# Altium PCB ETR_CELLMETER_CELL_HOLDER.PcbDoc
Units mm, origin at the board's own origin, x right, y up, seen from the top; angles counter-clockwise.
Board outline 50 x 120 mm, 2 copper layers (Top Layer, Bottom Layer); 6 components, 4 nets, 15 pads, 83 vias.
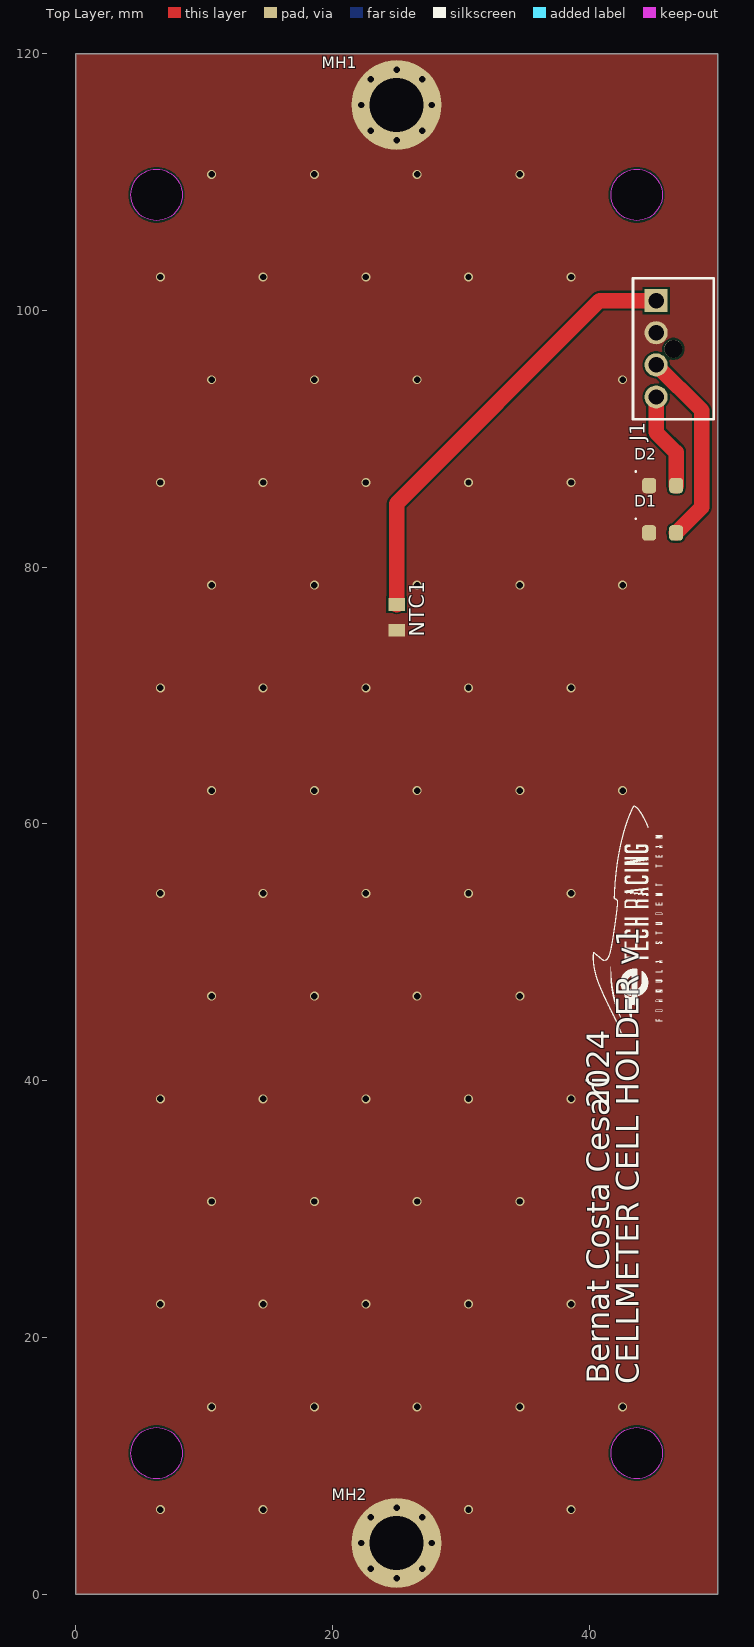
[diagram p0: Top Layer view]
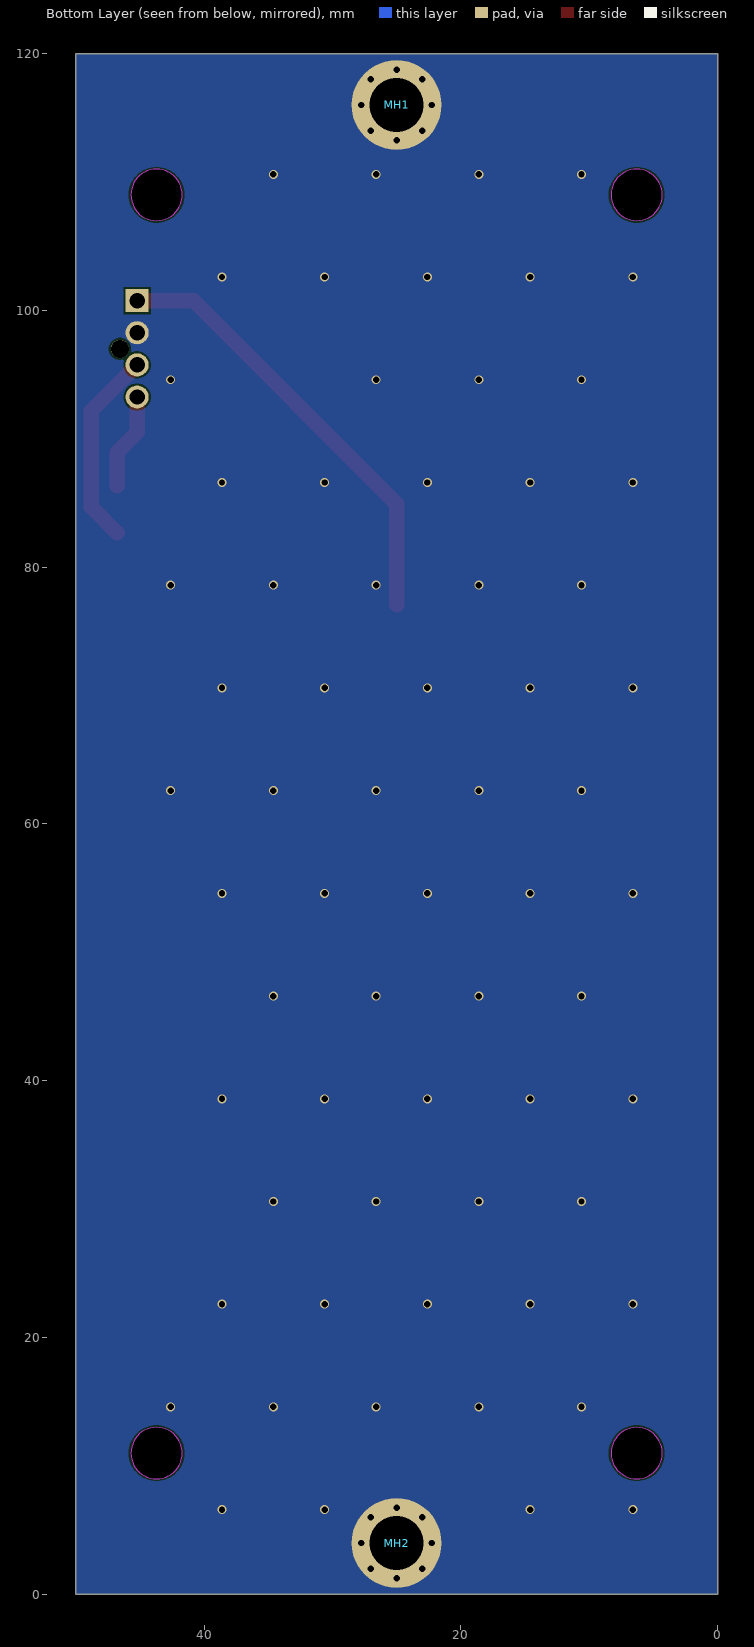
[diagram p1: Bottom Layer view, seen from below]
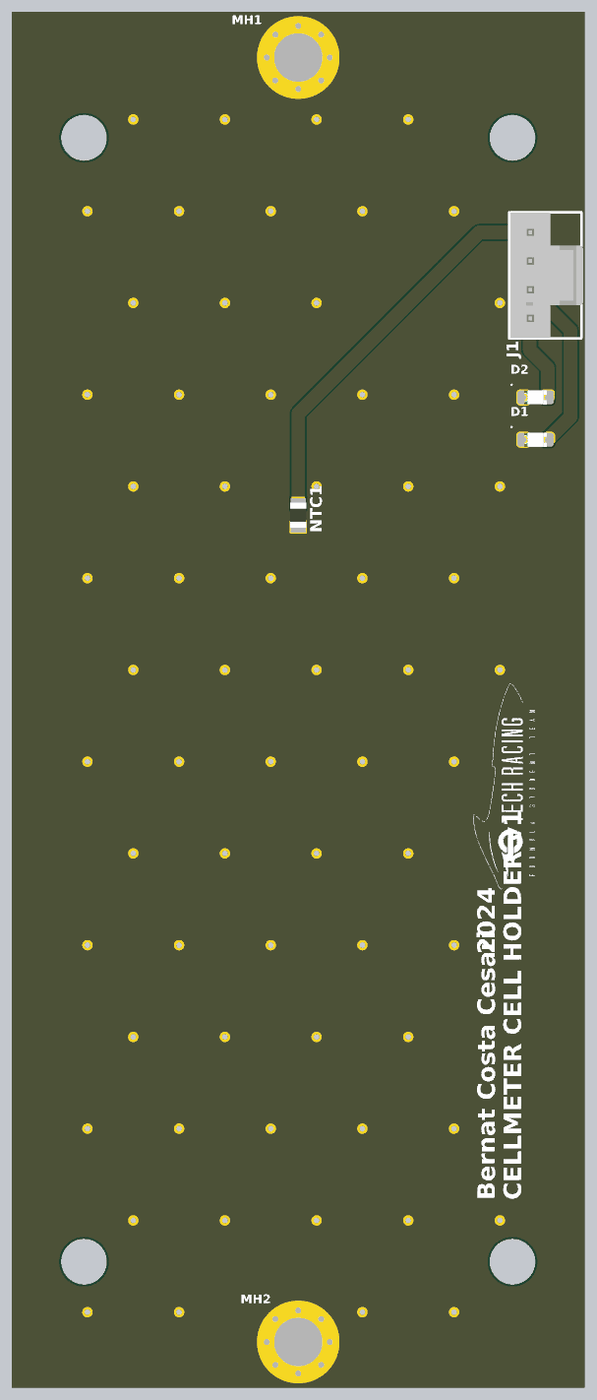
[diagram p2: 3D render of the assembled board from above, using the file's embedded part models]

## Layer stack, top to bottom
Top Solder: solder mask 0.0102, Solder Resist, Dk 3.5
Top Layer: signal copper 0.035
Dielectric 1: dielectric 0.32, FR-4, Dk 4.8
Bottom Layer: signal copper 0.035
Bottom Solder: solder mask 0.0102, Solder Resist, Dk 3.5

## Board outline
0,0 0,120 50,120 50,0
cut-out: 43.7,107 cw(c43.7,109) 41.7,109 cw(c43.7,109) 43.7,111 cw(c43.7,109) 45.7,109 cw(c43.7,109)
cut-out: 43.7,9 cw(c43.7,11) 41.7,11 cw(c43.7,11) 43.7,13 cw(c43.7,11) 45.7,11 cw(c43.7,11)
cut-out: 6.3,9 cw(c6.3,11) 4.3,11 cw(c6.3,11) 6.3,13 cw(c6.3,11) 8.3,11 cw(c6.3,11)
cut-out: 6.3,107 cw(c6.3,109) 4.3,109 cw(c6.3,109) 6.3,111 cw(c6.3,109) 8.3,109 cw(c6.3,109)

## Design rules (kind name [scope] priority, off if disabled: settings)
Clearance [All] p1: gap=0.15 ignorepadtopadclearanceinfootprint=TRUE
ComponentClearance [All] p1 off: gap=0 collisioncheckmode=3 verticalgap=0 showdistances=FALSE
HoleSize [All] p1: absolutevalues=TRUE maxlimit=5 minlimit=0.025 maxpercent=80.000 minpercent=20.000
MinimumSolderMaskSliver [All] p1: minsoldermaskwidth=0.1
PolygonConnect [All] p1: connectstyle=Direct reliefconductorwidth=0.254 reliefentries=4 polygonreliefangle="90 Angle" airgapwidth=0.254
RoutingVias [All] p1: holewidth=0.3 width=0.55 viastyle="Through Hole" minholewidth=0.3 minwidth=0.55 maxholewidth=0.711 maxwidth=1.27
SolderMaskExpansion [All] p1: expansion=0.102 istentingtop=FALSE
SupplyNets "Schematic Supply Nets" [InNet('GND')] p1: voltage=0.000
Width [All] p1: maxlimit=10 minlimit=0.254 preferedwidth=0.254 minimp=50.000000 maximp=50.000000 favimp=50.000000
27 further rules are at their usual default settings.

## Components (designator, comment, footprint, x,y, rotation, side; value= is the part's Value field where it differs from the comment)
D1 "0805" LED_0805_WE 45.72,82.677 r0 top
D2 "0805" LED_0805_WE 45.72,86.36 r0 top
J1 "J_NanoFit_1x4_V" J_NanoFit_1x4_V 45.212,97.008 r90 top
MH1 "Mounting_Hole_M4" Mounting_Hole_M4 25,116 r0 top
MH2 "Mounting_Hole_M4" Mounting_Hole_M4 25,4 r0 top
NTC1 "NTC SMD 0805" RESC2012X10N 25,76.089 r90 top

## Footprints (in the part's own frame and the unit in brackets; to place one, negate y for a bottom-side part, rotate by r counter-clockwise, add the part's x,y. Pads: shape width x height; smd on the part's side, far side on the other; paste and mask are expansions set on the pad)
J_NanoFit_1x4_V [mm]
  round 1.4 hole 1.4 mask+0.055: 0(0,-1.34)
  rect 1.8x1.8 hole 1.2: 1(3.75,0)
  round 1.8 hole 1.2 mask+0.055: 2(1.25,0) 3(-1.25,0)
  round 1.8 hole 1.2: 4(-3.75,0)
  silkscreen extent -5.5,-4.5 5.5,1.8, body extent -5.47,-4.65 5.47,1.69, height 10.68
LED_0805_WE [mm] "SODFL, 2-Leads, Body 1,60x3,20mm, IPC Medium Density"
  rrect50% 1.1x1.2 smd: A(1.05,0) K(-1.05,0)
  silkscreen extent -2.15,1.05 -2.05,1.15, body extent -1,-0.62 1,0.63, height 0.7
Mounting_Hole_M4 [mm]
  round 7 all layers, no hole: 1(0,0)
  round 7 smd far side: 1(0,0)
RESC2012X10N [mm] "Chip Resistor, 2-Leads, Body 2,00x1,25mm, IPC Medium Density"
  rect 1x1.3 smd: 1(-1,0) 2(1,0)
  body extent -1.1,-0.7 1.1,0.7, height 0.95

## Part data
D1: library part CMP-00131-2, "Led, Green, 520 Nm, 3.2 V, 30 Ma, 450 Mcd Rohs Compliant: Yes", Case Code (Metric)=2012, Color=Green, Forward Current=30mA, Forward Voltage=3.2V, Manufacturer 1="Wurth Electronics", Manufacturer Part Number 1=150080GS75000, Max Operating Temperature=85°C, Min Operating Temperature=-40°C, Package Quantity=4000, Test Current=20mA, .Creator=GP, Case Code (Imperial)=0805, Case/Package=0805, Category=LEDs, ComponentLink1Description=Datasheet, ComponentLink1URL=https://www.we-online.com/catalog/datasheet/150080GS75000.pdf, ComponentLink2Description="Where buy it", ComponentLink2URL=https://katalog.we-online.de/en/led/WL-SMCW/150080GS75000, ComponentLink3Description=https://datasheet.ciiva.com/29563/150080gs75000-29563008.pdf?src-supplier=Digi-Key, ComponentLink3URL=https://datasheet.ciiva.com/29563/150080gs75000-29563008.pdf?src-supplier=Digi-Key, ComponentLink4Description=https://datasheet.ciiva.com/29279/759434-da-01-en-chipled-0805-w-kl-gruen-150080gs75000-29279039.pdf?src-supplier=Conrad, ComponentLink4URL=https://datasheet.ciiva.com/29279/759434-da-01-en-chipled-0805-w-kl-gruen-150080gs75000-29279039.pdf?src-supplier=Conrad, Design Item ID=LEDGS-0805-450, Dominant Wavelength=520nm, Height=0.7mm, Length=2mm, Lens Style=Clear,Rectangular, Luminous Intensity=450mcd, Mount="Surface Mount", Packaging="Cut Tape", Pricing 1="50=0,19300, 500=0,12900, 1000=0,12300, 2000=0,11700, 4000=0,11100 (USD)", REACH SVHC=Unknown, RoHS=Yes, RoHS Compliant=Yes, Source=Semiconductor.SchLib, Stock 1=4350, Viewing Angle=140°, Wavelength=520nm, Width=1.25mm
D2: library part CMP-00133-1, "0805(H=0.8mm) 红色 高亮 λD=625nm VF=2V IF=30mA PD=72mW", Case Code (Metric)=2012, Color=Red, Forward Current=30mA, Forward Voltage=2V, Manufacturer 1="Wurth Electronics", Manufacturer Part Number 1=150080RS75000, Max Operating Temperature=85°C, Min Operating Temperature=-40°C, Package Quantity=4000, Test Current=20mA, .Creator=DR, Case Code (Imperial)=0805, Case/Package=0805, Category=LEDs, ComponentLink1Description=Datasheet, ComponentLink1URL=https://www.we-online.com/catalog/datasheet/150080RS75000.pdf, ComponentLink2Description="Where buy it", ComponentLink2URL=https://katalog.we-online.de/en/led/WL-SMCW/150080RS75000, ComponentLink3Description=https://datasheet.ciiva.com/22656/150080rs75000-22656961.pdf?src-supplier=Element14, ComponentLink3URL=https://datasheet.ciiva.com/22656/150080rs75000-22656961.pdf?src-supplier=Element14, ComponentLink4Description=https://datasheet.ciiva.com/29279/759435-da-01-en-chipled-0805-w-kl-rot-150080rs75000-29279032.pdf?src-supplier=Conrad, ComponentLink4URL=https://datasheet.ciiva.com/29279/759435-da-01-en-chipled-0805-w-kl-rot-150080rs75000-29279032.pdf?src-supplier=Conrad, Design Item ID=LEDRS-0805-150, Dominant Wavelength=625nm, Height=0.7mm, Length=2mm, Lens Style=Clear,Rectangular, Luminous Intensity=150mcd, Mount="Surface Mount", Packaging="Tape and Reel", Pricing 1="50=0,19300, 500=0,12900, 1000=0,12300, 2000=0,11700, 4000=0,11100 (USD)", REACH SVHC=Unknown, RoHS=Yes, RoHS Compliant=Yes, Source=Semiconductor.SchLib, Stock 1=1, Viewing Angle=140°, Wavelength=625nm, Width=1.25mm
J1: library part CMP-00018-1, "Nano-Fit Vertical Header Through Hole 2.50mm Pitch Single Row 4 Circuits with Kinked Pins 0.38", Manufacturer 1=Molex, Manufacturer Part Number 1=105309-1204, .Creator=DO, Category="Headers and Wire Housings", ComponentLink1Description=http://farnell.com//datasheets/2221349.pdf?src-supplier=Farnell, ComponentLink1URL=http://farnell.com//datasheets/2221349.pdf?src-supplier=Farnell, ComponentLink2Description=http://www.farnell.com/datasheets/2221349.pdf?src-supplier=Newark, ComponentLink2URL=http://www.farnell.com/datasheets/2221349.pdf?src-supplier=Newark, ComponentLink3Description=http://www.literature.molex.com/SQLImages/kelmscott/Molex/PDF_Images/987651-1223.PDF?src-supplier=Digi-Key, ComponentLink3URL=http://www.literature.molex.com/SQLImages/kelmscott/Molex/PDF_Images/987651-1223.PDF?src-supplier=Digi-Key, ComponentLink4Description=http://www.farnell.com/datasheets/2059602.pdf?src-supplier=Element14, ComponentLink4URL=http://www.farnell.com/datasheets/2059602.pdf?src-supplier=Element14, Design Item ID=J_NanoFit_1x4_V, Pricing 1="1=1,37050, 10=1,11700, 100=0,95270, 500=0,86980, 1000=0,74060, 2500=0,71930, 5000=0,68450, 10000=0,66860 (USD)", RoHS=No, Source=Electromechanical.SchLib, Stock 1=709
MH1 MH2: library part CMP-00041-6, "Mounting Hole M4", Design Item ID=Mounting_Hole_M4, Source=Electromechanical.SchLib
NTC1: library part CMP-010-00001-1, "NTC 0805 package 10kR"

## Via types
v1: diameter 0.7, hole 0.5, Top Layer to Bottom Layer, 81 vias
v2: diameter 4.4, hole 4.2, Top Layer to Bottom Layer, 2 vias

## Nets (pads, with @x,y where several pads share a name; then routed paths per layer and width w, separated by ;. In a path a pad name is that pad's centre, name@x,y a point inside that pad or via, vN(x,y) a via of type N, cw(c..) or ccw(c..) an arc to the next point about the centre after c; other vN are vias at no path point)
GND: D1.K D2.K J1.2 MH1.1 MH2.1 NTC1.1
  other v1: 25,1.25 23,2 27,2 22.25,4 27.75,4 23,6 27,6 6.6,6.6 14.6,6.6 30.6,6.6 38.6,6.6 25,6.75 10.6,14.6 18.6,14.6 26.6,14.6 34.6,14.6 42.6,14.6 6.6,22.6 14.6,22.6 22.6,22.6 30.6,22.6 38.6,22.6 10.6,30.6 18.6,30.6 26.6,30.6 34.6,30.6 6.6,38.6 14.6,38.6 22.6,38.6 30.6,38.6 38.6,38.6 10.6,46.6 18.6,46.6 26.6,46.6 34.6,46.6 6.6,54.6 14.6,54.6 22.6,54.6 30.6,54.6 38.6,54.6 10.6,62.6 18.6,62.6 26.6,62.6 34.6,62.6 42.6,62.6 6.6,70.6 14.6,70.6 22.6,70.6 30.6,70.6 38.6,70.6 10.6,78.6 18.6,78.6 26.6,78.6 34.6,78.6 42.6,78.6 6.6,86.6 14.6,86.6 22.6,86.6 30.6,86.6 38.6,86.6 10.6,94.6 18.6,94.6 26.6,94.6 42.6,94.6 6.6,102.6 14.6,102.6 22.6,102.6 30.6,102.6 38.6,102.6 10.6,110.6 18.6,110.6 26.6,110.6 34.6,110.6 25,113.25 23,114 27,114 22.25,116 27.75,116 23,118 27,118 25,118.75
  other v2: 25,4 25,116
LED1: D1.A J1.3 | length 15.4
  Top Layer w1.2: J1.3 48.768,92.202 48.768,84.675 D1.A
LED2: D2.A J1.4 | length 7.5
  Top Layer w1.2: J1.4 45.212,90.507 46.77,88.949 D2.A
NTC+: J1.1 NTC1.2 | length 34.6
  Top Layer w1.2: NTC1.2 25,84.944 40.814,100.758 J1.1
pads on no net: J1.0

## Polygon pours and split planes (outlines as drawn)
GND on Bottom Layer "GND_L02_P001" (solid, pour order 1): 0,0 50,0 50,120 0,120
GND on Top Layer "GND_L01_P002" (solid, pour order 2): 0,0 50,0 50,120 0,120

## Silkscreen, mask and mechanical layers (free items; w line width, h text height)
Top Overlay:
  drawing of 32 lines, arcs and shapes, not listed
  text "2024" at 42.164,37.849 h3 r90
  text "Bernat Costa Cesari" at 42.164,16.386 h3 r90
  text "CELLMETER CELL HOLDER v1" at 44.45,16.383 h3 r90
Mechanical 1:
  the board outline again, w0.1